# Altium PCB PCB.PcbDoc
Units mm, origin at the board's own origin, x right, y up, seen from the top; angles counter-clockwise.
Board outline 30 x 15 mm, 2 copper layers (Top Layer, Bottom Layer); 14 components, 8 nets, 36 pads, 8 vias.
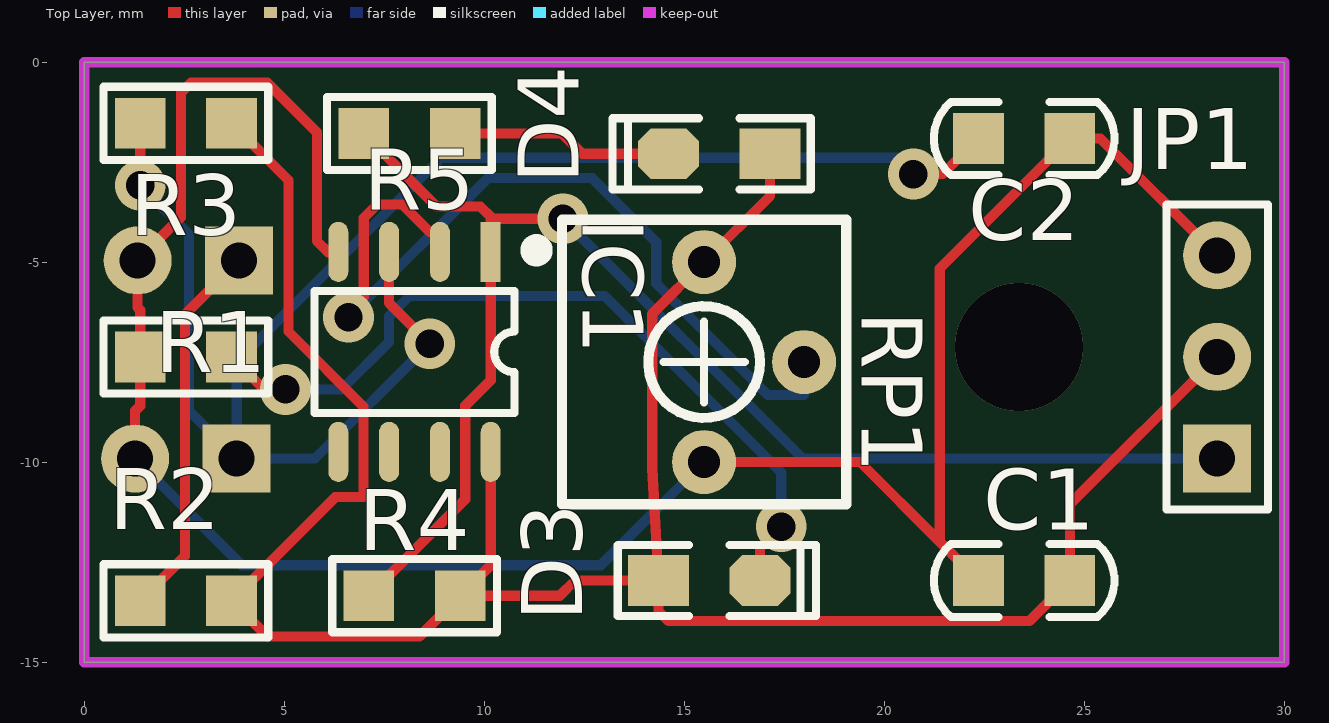
[diagram p0: Top Layer view]
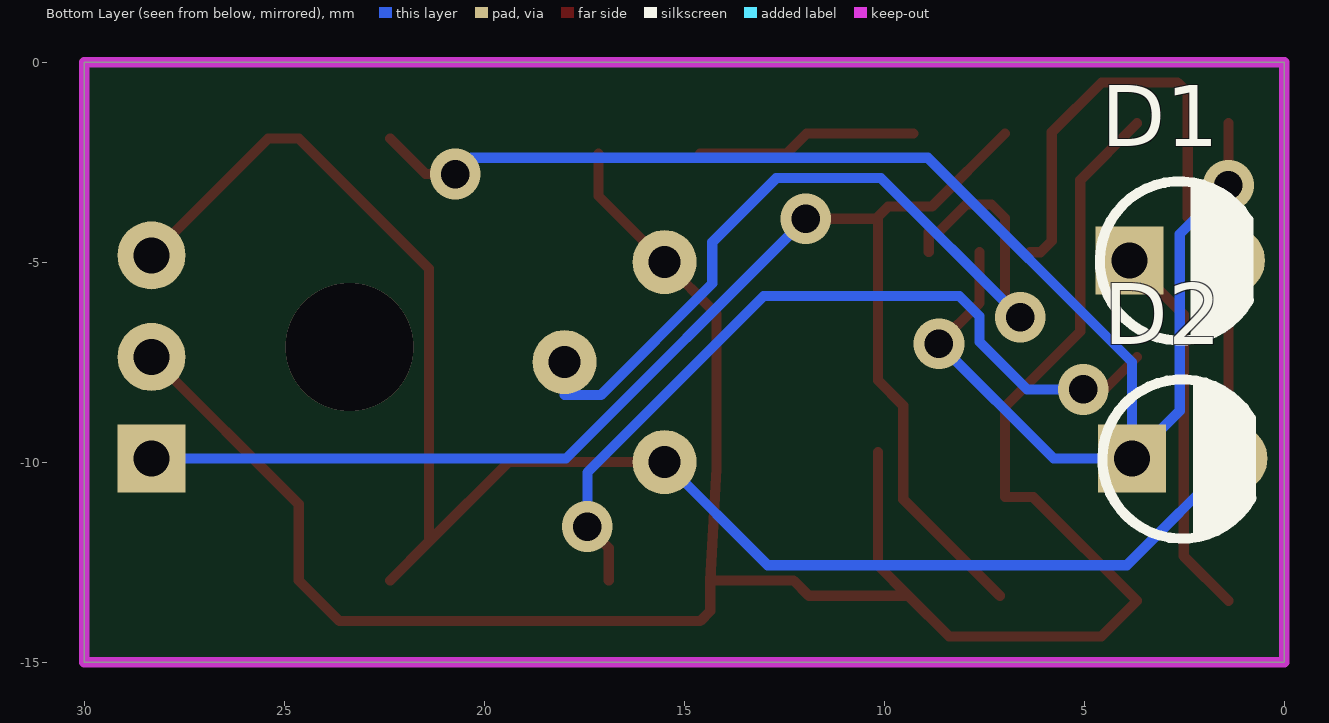
[diagram p1: Bottom Layer view, seen from below]

## Layer stack, top to bottom
Top Solder: solder mask 0.0102, Solder Resist, Dk 3.5
Top Layer: signal copper 0.0356
Dielectric 1: dielectric 0.32, FR-4, Dk 4.8
Bottom Layer: signal copper 0.0356
Bottom Solder: solder mask 0.0102, Solder Resist, Dk 3.5

## Board outline
0,-15 30,-15 30,0 0,0

## Design rules (kind name [scope] priority, off if disabled: settings)
Clearance [All] p1: gap=0.254
PolygonConnect [All] p1: connectstyle=Relief reliefconductorwidth=0.254 reliefentries=4 polygonreliefangle="90 Angle" airgapwidth=0.254
RoutingVias [All] p1: holewidth=0.711 width=1.27 viastyle="Through Hole" minholewidth=0.711 minwidth=1.27 maxholewidth=0.711 maxwidth=1.27
SolderMaskExpansion [All] p1: expansion=0.102
Width [All] p1: maxlimit=0.254 minlimit=0.254 preferedwidth=0.254
30 further rules are at their usual default settings.

## Components (designator, comment, footprint, x,y, rotation, side; value= is the part's Value field where it differs from the comment)
C1 "104" "C 0805" 23.495,-12.954 r0 top
C2 "104" "C 0805" 23.495,-1.905 r180 top
D1 "红外发射" "LED 3MM-B" 2.603,-4.953 r180 bottom
D2 "红外接收" "LED 3MM-B" 2.54,-9.906 r180 bottom
D3 "电源指示" "LED 0805G" 15.621,-12.954 r0 top
D4 "开关指示" "LED 0805G" 15.875,-2.286 r180 top
IC1 "LM393" SOP8_L 8.255,-7.239 r270 top
JP1 "HDR-1X3" HDR-1X3 28.321,-9.906 r90 top
R1 "1K" "R 0805" 2.54,-7.366 r0 top
R2 "100" "R 0805" 2.54,-13.462 r0 top
R3 "10K" "R 0805" 2.54,-1.524 r0 top
R4 "10K" "R 0805" 8.255,-13.335 r0 top
R5 "1K" "R 0805" 8.128,-1.778 r0 top
RP1 "10K" 3362P 15.494,-7.493 r270 top

## Footprints (in the part's own frame and the unit in brackets; to place one, negate y for a bottom-side part, rotate by r counter-clockwise, add the part's x,y. Pads: shape width x height; smd on the part's side, far side on the other; paste and mask are expansions set on the pad)
3362P [mm]
  round 1.6 hole 0.8: 1(-2.5,0) 2(0,2.5) 3(2.5,0)
  silkscreen extent -3.56,-3.56 3.56,3.56, body extent -3.3,-3.3 3.3,3.3, height 4.74
"C 0805" [mil] "无极性贴片电容"
  rect 50x50 smd: 1(-45,0) 2(45,0)
  silkscreen extent -89,-36 89,36, body extent -39,-24 39,24, height 20
HDR-1X3 [mm] "排针，3脚"
  rect 1.7x1.7 hole 0.9: 1(0,0)
  round 1.7 hole 0.9: 2(2.54,0) 3(5.08,0)
  silkscreen extent -1.27,-1.27 6.35,1.27, body extent -1.27,-1.27 6.35,1.27, height 8.5
"LED 3MM-B" [mm] "蓝色3mm直插LED"
  rect 1.7x1.7 hole 0.9: 1(-1.27,0)
  round 1.7 hole 0.9: 2(1.27,0)
  silkscreen extent -2.01,-2 1.72,1.98, body extent -1.95,-1.95 1.64,1.95, height 5.55
"LED 0805G" [mil] "绿色0805LED"
  rect 60x50 smd: 1(-50,0)
  oct 60x50 smd: 2(50,0)
  silkscreen extent -90,-35 105,35, body extent -39,-25 39,25, height 32
"R 0805" [mil] "1/8W贴片电阻"
  rect 50x50 smd: 1(-45,0) 2(45,0)
  silkscreen extent -81,-36 81,36, body extent -39,-25 39,25, height 20
SOP8_L [mm] "5*6*1.8mm（长宽高）"
  rect 1.5x0.5 smd: 1(-2.5,1.905)
  oval 1.5x0.5 smd: 2(-2.5,0.635) 3(-2.5,-0.635) 4(-2.5,-1.905) 5(2.5,-1.905) 6(2.5,-0.635) 7(2.5,0.635) 8(2.5,1.905)
  silkscreen extent -2.69,-2.5 1.52,3.2, body extent -3,-2.5 3,2.5, height 1.9

## Part data
C1 C2: library part C, "无极性贴片电容"
D1 D2: library part LED-3MM, "插件LED"
D3 D4: library part LED-SMD, "贴片LED"
IC1: "双路电压比较"
JP1: library part "Header 3", "3P接插件"
R1 R2 R3 R4 R5: library part R, "贴片电阻"
RP1: library part RP-ID, "插件单联电位器"

## Via types
v1: diameter 1.27, hole 0.711, Top Layer to Bottom Layer, 7 vias
v2: diameter 3.2, hole 3.2, Top Layer to Bottom Layer, 1 vias

## Nets (pads, with @x,y where several pads share a name; then routed paths per layer and width w, separated by ;. In a path a pad name is that pad's centre, name@x,y a point inside that pad or via, vN(x,y) a via of type N, cw(c..) or ccw(c..) an arc to the next point about the centre after c; other vN are vias at no path point)
A0: IC1.1 JP1.1 R4.1 R5.1 | length 35.4
  Top Layer w0.254: R5.1 8.814,-3.607 9.906,-3.607 10.16,-3.861 10.16,-3.912 ; R4.1 9.525,-10.922 9.525,-8.585 10.16,-7.95 IC1.1 10.16,-3.912 ; v1(11.963,-3.912) 10.16,-3.912
  Bottom Layer w0.254: v1(11.963,-3.912) 17.958,-9.906 JP1.1
GND: C1.1 C2.1 D1.2 D2.2 IC1.4 JP1.3 R1.1 RP1.3 | length 57.9
  Top Layer w0.254: D2.2 1.27,-8.712 1.397,-8.585 R1.1 1.397,-6.198 1.333,-6.133 D1.2 2.413,-3.873 2.413,-0.762 2.667,-0.508 4.572,-0.508 5.814,-1.75 5.814,-4.468 6.096,-4.75 6.35,-4.75 IC1.4 ; RP1.3 19.391,-9.993 21.387,-11.989 ; C1.1 21.387,-11.989 ; JP1.3 25.4,-1.905 C2.1 21.387,-5.156 21.387,-11.989
  Bottom Layer w0.254: D2.2 3.937,-12.573 12.914,-12.573 RP1.3
NetC2_2: C2.2 D2.1 IC1.3 R3.1 | length 41.7
  Top Layer w0.254: v1(1.397,-3.073) R3.1 ; IC1.3 7.62,-6.02 v1(8.636,-7.036) ; v1(20.726,-2.794) 21.463,-2.794 C2.2
  Bottom Layer w0.254: v1(1.397,-3.073) 2.616,-4.293 2.616,-8.712 D2.1 ; v1(8.636,-7.036) 5.766,-9.906 D2.1 ; v1(20.726,-2.794) 20.32,-2.388 8.915,-2.388 3.81,-7.493 D2.1
NetD1_1: D1.1 R2.1 | length 9.5
  Top Layer w0.254: R2.1 2.515,-12.344 2.515,-6.311 D1.1
NetD3_2: D3.2 R1.2 | length 20.2
  Top Layer w0.254: R1.2 4.496,-8.179 v1(5.029,-8.179) ; D3.2 16.891,-12.141 v1(17.425,-11.608)
  Bottom Layer w0.254: v1(5.029,-8.179) 6.428,-8.179 7.62,-6.986 7.62,-6.35 8.128,-5.842 13.013,-5.842 17.425,-10.253 v1(17.425,-11.608)
NetD4_2: D4.2 R5.2 | length 5.5
  Top Layer w0.254: R5.2 11.938,-1.778 12.446,-2.286 D4.2
NetIC1_2: IC1.2 RP1.2 | length 22
  Top Layer w0.254: v1(6.604,-6.375) 6.604,-6.248 6.985,-5.867 6.985,-3.893 7.322,-3.556 7.95,-3.556 8.636,-4.242 8.89,-4.242 IC1.2
  Bottom Layer w0.254: v1(6.604,-6.375) 10.084,-2.896 12.7,-2.896 14.3,-4.496 14.3,-5.53 17.09,-8.32 17.994,-8.32 RP1.2
VCC: C1.2 D3.1 D4.1 IC1.8 JP1.2 R2.2 R3.2 R4.2 RP1.1 | length 61.2
  Top Layer w0.254: R3.2 5.104,-2.945 5.104,-6.731 6.981,-8.608 6.981,-10.87 6.275,-10.87 R2.2 4.572,-14.351 8.382,-14.351 R4.2 ; IC1.8 10.16,-12.573 R4.2 ; D4.1 17.145,-3.342 RP1.1 14.199,-6.288 14.199,-10.16 D3.1 ; JP1.2 24.638,-11.049 C1.2 23.622,-13.97 14.605,-13.97 14.351,-13.716 D3.1 ; R4.2 11.887,-13.335 12.268,-12.954 D3.1
pads on no net: IC1.5 IC1.6 IC1.7
copper on no net:
  other v2: 23.368,-7.112

## Keep-outs
Keep-Out Layer:
  the board outline again, w0.254